# EAGLE board ESpdesign_1 (EAGLE 9.6.2)
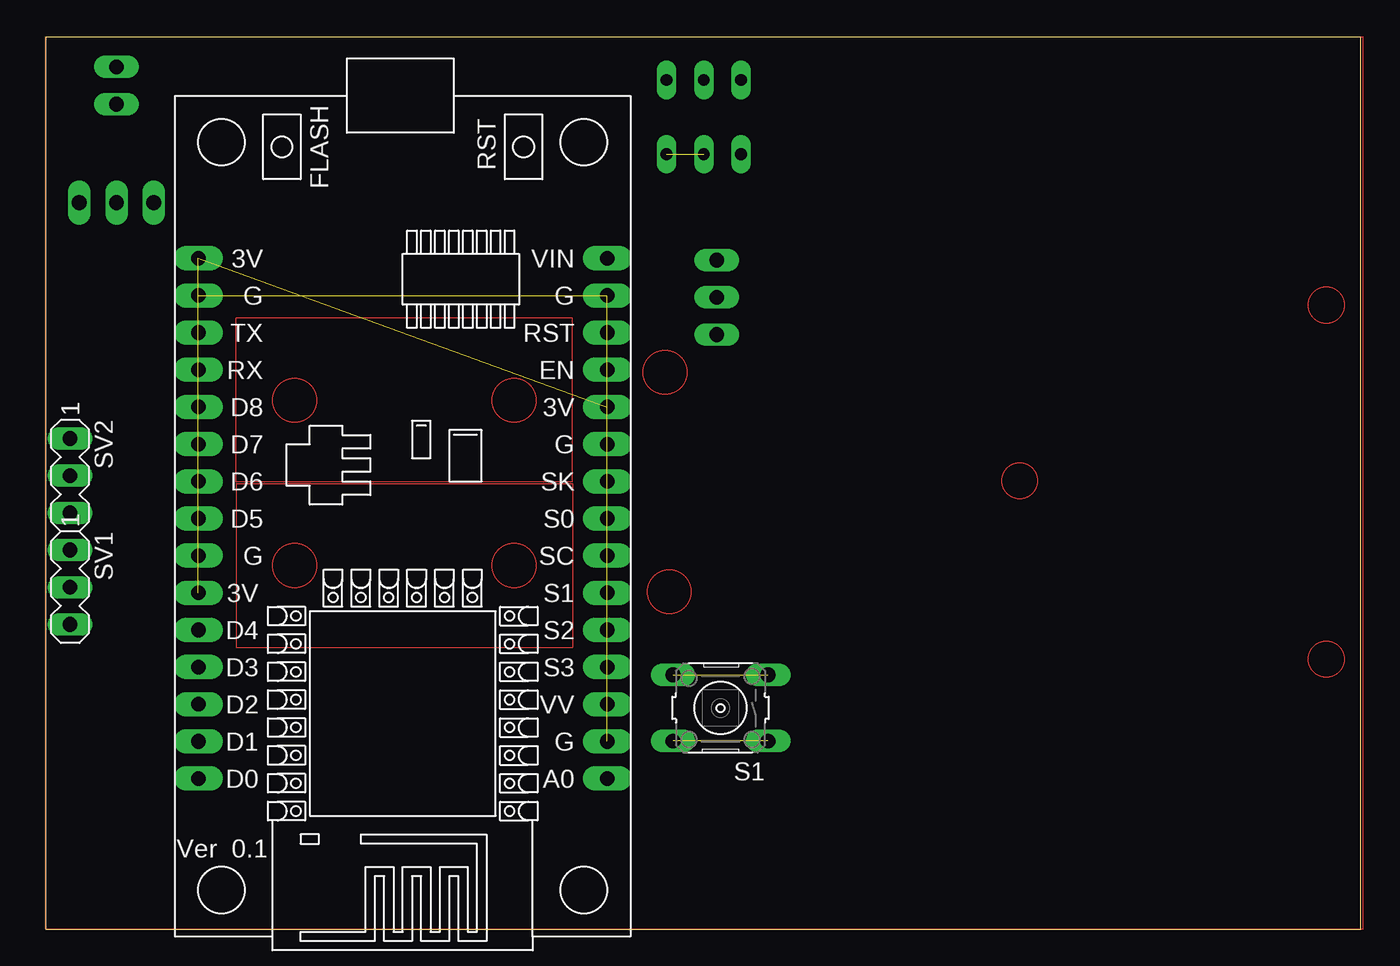
[diagram p0: board, top side]
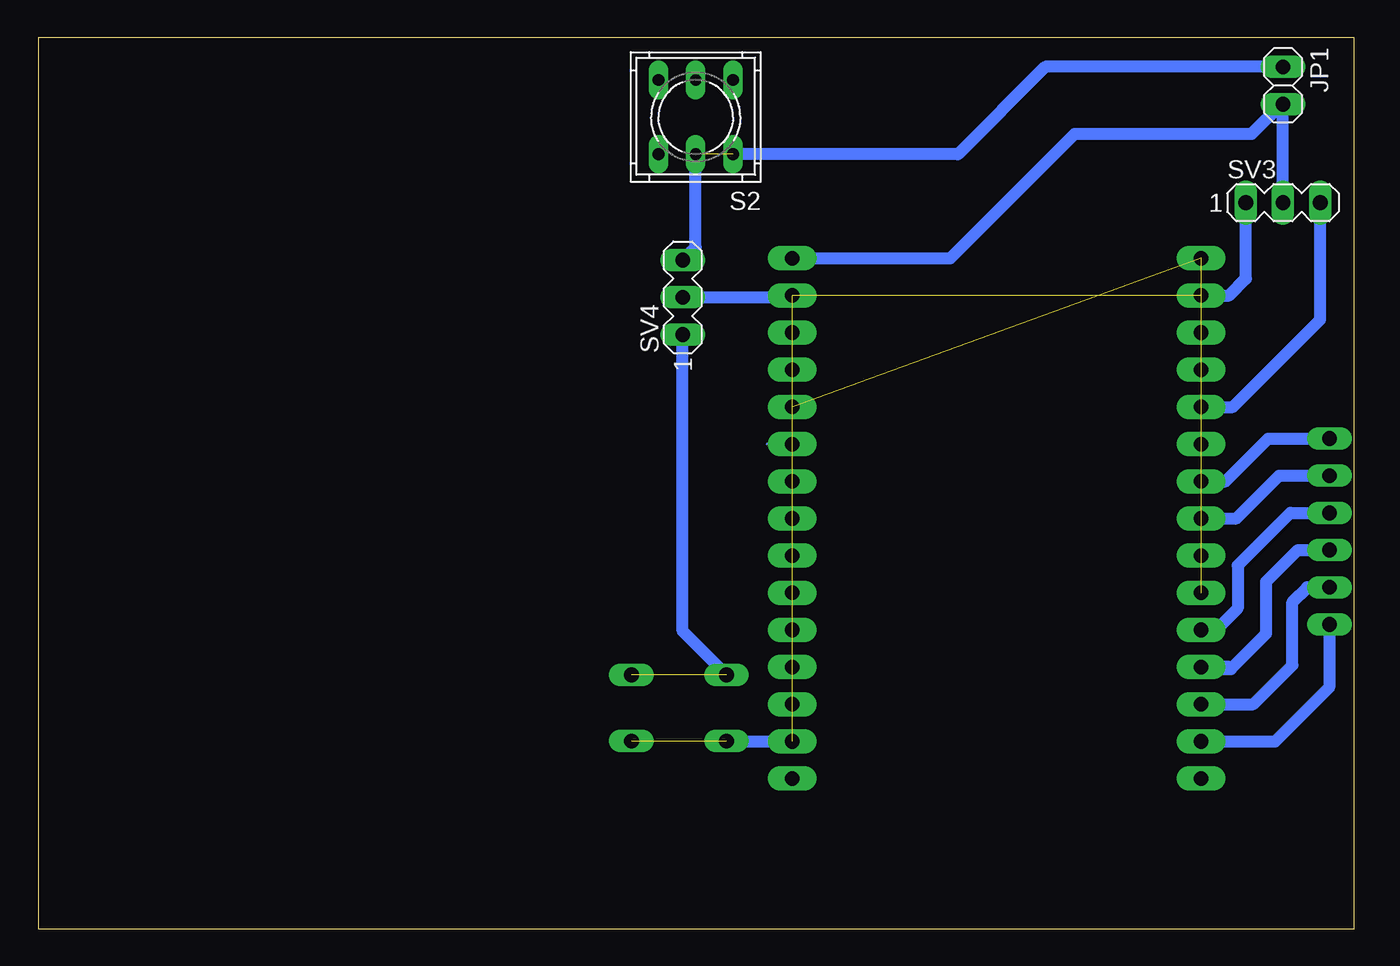
[diagram p1: board, bottom side, seen from below]

Size 89.84 x 60.95 mm. Coordinates in mm from the lower left corner, seen from the top.
Outline: 0,0 89.84,0 89.84,60.95 0,60.95 0,0
Copper layers (1*16): Top 0.035mm / dielectric 1.5mm / Bottom 0.035mm
Design rules "default": minimum track width 6mil, minimum drill 0.35mm, track to track 6mil, track to pad 6mil, pad to pad 6mil, via to via 6mil, smd to smd 6mil, copper to edge 40mil, drill to drill 6mil, minimum pad ring 10mil, minimum via ring 8mil, stop-mask expansion 4mil, vias tented up to drill 0mil, thermal gap 10mil

## Footprints (pad centres in the part's own frame; a part is rotated, then mirrored left to right if it is on the bottom)
1X02 = drill 1.016 long: 1 -1.27,0; 2 1.27,0
B3F-10XX = drill 1.016 long: 1 -3.251,2.261; 2 3.251,2.261; 3 -3.251,-2.261; 4 3.251,-2.261
9077-2 = drill 0.813 long: 1 -2.54,2.54; 2 0,2.54; 3 2.54,2.54; 4 -2.54,-2.54; 5 0,-2.54; 6 2.54,-2.54
MA03-1 = drill 1.016 long: 1 -2.54,0; 2 0,0; 3 2.54,0
NODEMCU = drill 1 pad 1.676 long: 1 -13.97,17.78; 2 -13.97,15.24; 3 -13.97,12.7; 4 -13.97,10.16; 5 -13.97,7.62; 6 -13.97,5.08; 7 -13.97,2.54; 8 -13.97,0; 9 -13.97,-2.54; 10 -13.97,-5.08; 11 -13.97,-7.62; 12 -13.97,-10.16; 13 -13.97,-12.7; 14 -13.97,-15.24; 15 -13.97,-17.78; 16 13.97,-17.78; 17 13.97,-15.24; 18 13.97,-12.7; 19 13.97,-10.16; 20 13.97,-7.62; 21 13.97,-5.08; 22 13.97,-2.54; 23 13.97,0; 24 13.97,2.54; 25 13.97,5.08; 26 13.97,7.62; 27 13.97,10.16; 28 13.97,12.7; 29 13.97,15.24; 30 13.97,17.78

## Placement (x,y rotation side)
JP1  [1X02]  4.83,57.66 270 bottom
S1  [B3F-10XX]  46.1,15.11 180 top
S2  9077-2  [9077-2]  44.96,55.5 180 bottom
SV1  [MA03-1]  1.65,23.37 270 top
SV2  [MA03-1]  1.65,30.99 270 top
SV3  [MA03-1]  4.83,49.66 0 bottom
SV4  [MA03-1]  45.85,43.18 90 bottom
U$1  NODEMCU  [NODEMCU]  24.38,28.07 180 top

## Library data of the parts
JP1 = pinhead
S1 = switch-omron; MPN: B3F-1000; OC_FARNELL: 176432; OC_NEWARK: 36M3542
S2 = switch-misc-edited
SV1-SV4 = con-lstb; OC_FARNELL: unknown; OC_NEWARK: unknown
U$1 = nodemcu

## Nets
3V: U$1.11 U$1.16 U$1.25
5V: JP1.2 SV3.2 U$1.15
B-: S1.3 S1.4 SV4.1
D1: SV1.3 U$1.29
D2: SV1.2 U$1.28
D3: SV1.1 U$1.27
D4: SV2.3 U$1.26
D5: SV2.2 U$1.23
D6: SV2.1 U$1.22
D7: U$1.21
D8: SV3.3 U$1.20
GND: S1.1 S1.2 SV3.1 SV4.2 U$1.2 U$1.10 U$1.14 U$1.17 U$1.24
P+: JP1.1 S2.1 S2.2 SV4.3

## Tracks (layer width: path | path; a pad name or v marks a point on that pad's centre or on a via)
3V  (2 unrouted)
5V
  Bottom 0.813: SV3.2 JP1.2 4.95,56.39 6.99,54.36 19.05,54.36 27.56,45.85 U$1.15
B-  (1 unrouted)
  Bottom 0.813: S1.4 45.85,20.37 SV4.1
D1
  Bottom 0.813: U$1.29 5.36,12.83 1.68,16.51 1.68,20.8 SV1.3
D2
  Bottom 0.813: U$1.28 6.86,15.37 4.19,18.03 4.19,22.35 3.17,23.37 SV1.2
D3
  Bottom 0.813: SV1.1 3.81,25.91 5.97,23.75 5.97,20.19 8.38,17.78 10.29,17.78 U$1.27 | 10.16,18.16 U$1.27 | 8.51,17.91 U$1.27
D4
  Bottom 0.813: SV2.3 4.32,28.45 7.92,24.84 7.92,21.92 9.53,20.32 10.29,20.32 U$1.26
D5
  Bottom 0.813: U$1.23 8,28.07 5.08,30.99 SV2.2
D6
  Bottom 0.813: U$1.22 8.76,30.61 5.84,33.53 SV2.1
D8
  Bottom 0.813: U$1.20 8.26,35.69 2.29,41.66 SV3.3
GND  (5 unrouted)
  Bottom 0.152: U$1.10 40.11,33.15
  Bottom 0.813: U$1.17 8.51,43.31 7.37,44.45 SV3.1 | S1.2 42.82,12.83 U$1.2 | SV4.2 38.48,43.18 U$1.14
N$1
  Top 0.001: 0,61 90,61 90,0 0,0 0,61
N$2
  Top 0.001: 36,30.55 13,30.55 13,41.75 36,41.75 36,30.55
N$3
  Top 0.001: 13,30.45 36,30.45 36,19.25 13,19.25 13,30.45
N$4
  Top 0.001: 1.45,33.7 1.85,33.7 1.85,33.34 1.45,33.34 1.45,33.7
N$5
  Top 0.001: 1.45,31.16 1.85,31.16 1.85,30.8 1.45,30.8 1.45,31.16
N$6
  Top 0.001: 1.45,28.61 1.85,28.61 1.85,28.27 1.45,28.27 1.45,28.61
N$7
  Top 0.001: 1.45,26.07 1.85,26.07 1.85,25.73 1.45,25.73 1.45,26.07
N$8
  Top 0.001: 1.45,23.54 1.85,23.54 1.85,23.31 1.45,23.31 1.45,23.54
N$9
  Top 0.001: 1.45,21 1.85,21 1.85,20.64 1.45,20.64 1.45,21
N$10
  Top 0.001: 10.19,20.14 10.84,20.14 10.84,20.54 10.19,20.54 10.19,20.14
N$11
  Top 0.001: 10.19,22.68 10.84,22.68 10.84,23.08 10.19,23.08 10.19,22.68
N$12
  Top 0.001: 10.19,25.22 10.84,25.22 10.84,25.62 10.19,25.62 10.19,25.22
N$13
  Top 0.001: 10.19,27.76 10.84,27.76 10.84,28.16 10.19,28.16 10.19,27.76
N$14
  Top 0.001: 10.19,30.3 10.84,30.3 10.84,30.7 10.19,30.7 10.19,30.3
N$15
  Top 0.001: 10.19,32.84 10.84,32.84 10.84,33.24 10.19,33.24 10.19,32.84
N$16
  Top 0.001: 10.19,35.38 10.84,35.38 10.84,35.78 10.19,35.78 10.19,35.38
N$17
  Top 0.001: 10.19,37.92 10.84,37.92 10.84,38.32 10.19,38.32 10.19,37.92
N$18
  Top 0.001: 10.19,40.46 10.84,40.46 10.84,40.86 10.19,40.86 10.19,40.46
N$19
  Top 0.001: 38.16,10.23 38.81,10.23 38.81,10.63 38.16,10.63 38.16,10.23
N$20
  Top 0.001: 38.16,12.77 38.81,12.77 38.81,13.17 38.16,13.17 38.16,12.77
N$21
  Top 0.001: 38.16,15.31 38.81,15.31 38.81,15.71 38.16,15.71 38.16,15.31
N$22
  Top 0.001: 38.16,17.85 38.81,17.85 38.81,18.25 38.16,18.25 38.16,17.85
N$23
  Top 0.001: 38.16,20.39 38.81,20.39 38.81,20.79 38.16,20.79 38.16,20.39
N$24
  Top 0.001: 38.16,22.93 38.81,22.93 38.81,23.33 38.16,23.33 38.16,22.93
N$25
  Top 0.001: 38.16,25.47 38.81,25.47 38.81,25.87 38.16,25.87 38.16,25.47
N$26
  Top 0.001: 38.16,28.01 38.81,28.01 38.81,28.41 38.16,28.41 38.16,28.01
N$27
  Top 0.001: 38.16,30.55 38.81,30.55 38.81,30.95 38.16,30.95 38.16,30.55
N$28
  Top 0.001: 38.16,33.09 38.81,33.09 38.81,33.49 38.16,33.49 38.16,33.09
N$29
  Top 0.001: 38.16,35.63 38.81,35.63 38.81,36.03 38.16,36.03 38.16,35.63
N$30
  Top 0.001: 38.16,38.17 38.81,38.17 38.81,38.57 38.16,38.57 38.16,38.17
N$31
  Top 0.001: 38.16,40.71 38.81,40.71 38.81,41.11 38.16,41.11 38.16,40.71
N$32
  Top 0.001: 38.16,43.25 38.81,43.25 38.81,43.65 38.16,43.65 38.16,43.25
N$33
  Top 0.001: 38.16,45.79 38.81,45.79 38.81,46.19 38.16,46.19 38.16,45.79
P+  (1 unrouted)
  Bottom 0.813: S2.1 27.05,52.96 21.08,58.93 JP1.1 | S2.2 44.96,46.61 SV4.3
(copper drawn outside any net)
  shapes: Top circle x9